# Altium PCB uc3843 flyback converter.PcbDoc
Units mm, origin at the board's own origin, x right, y up, seen from the top; angles counter-clockwise.
Board outline 81 x 40.73 mm, 2 copper layers (Top Layer, Bottom Layer); 30 components, 18 nets, 79 pads, 130 vias.
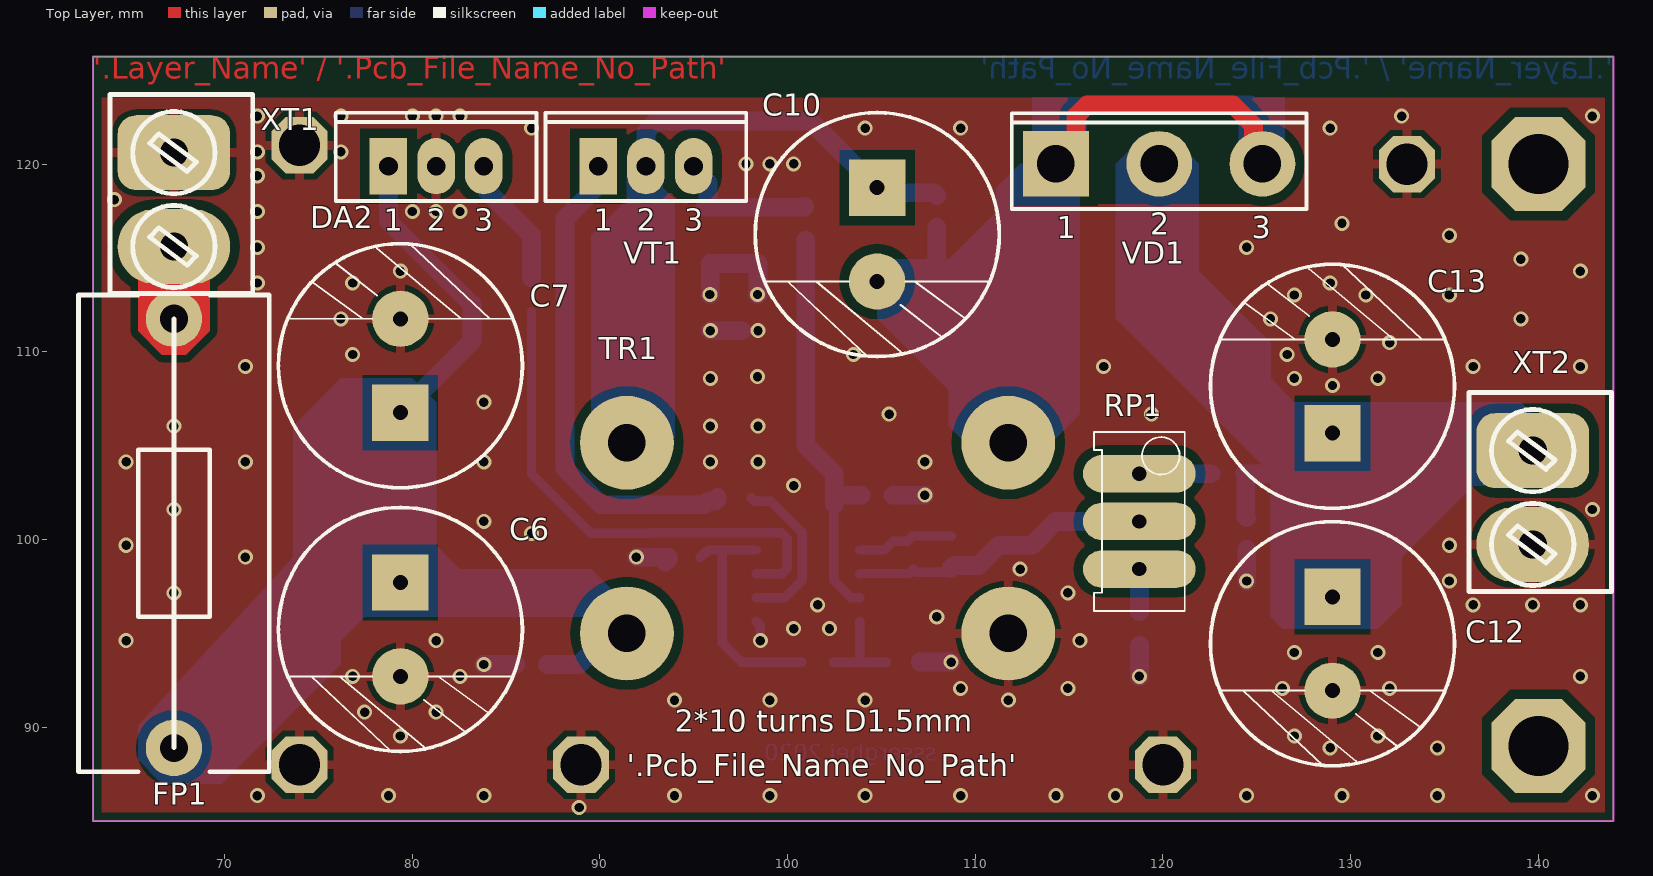
[diagram p0: Top Layer view]
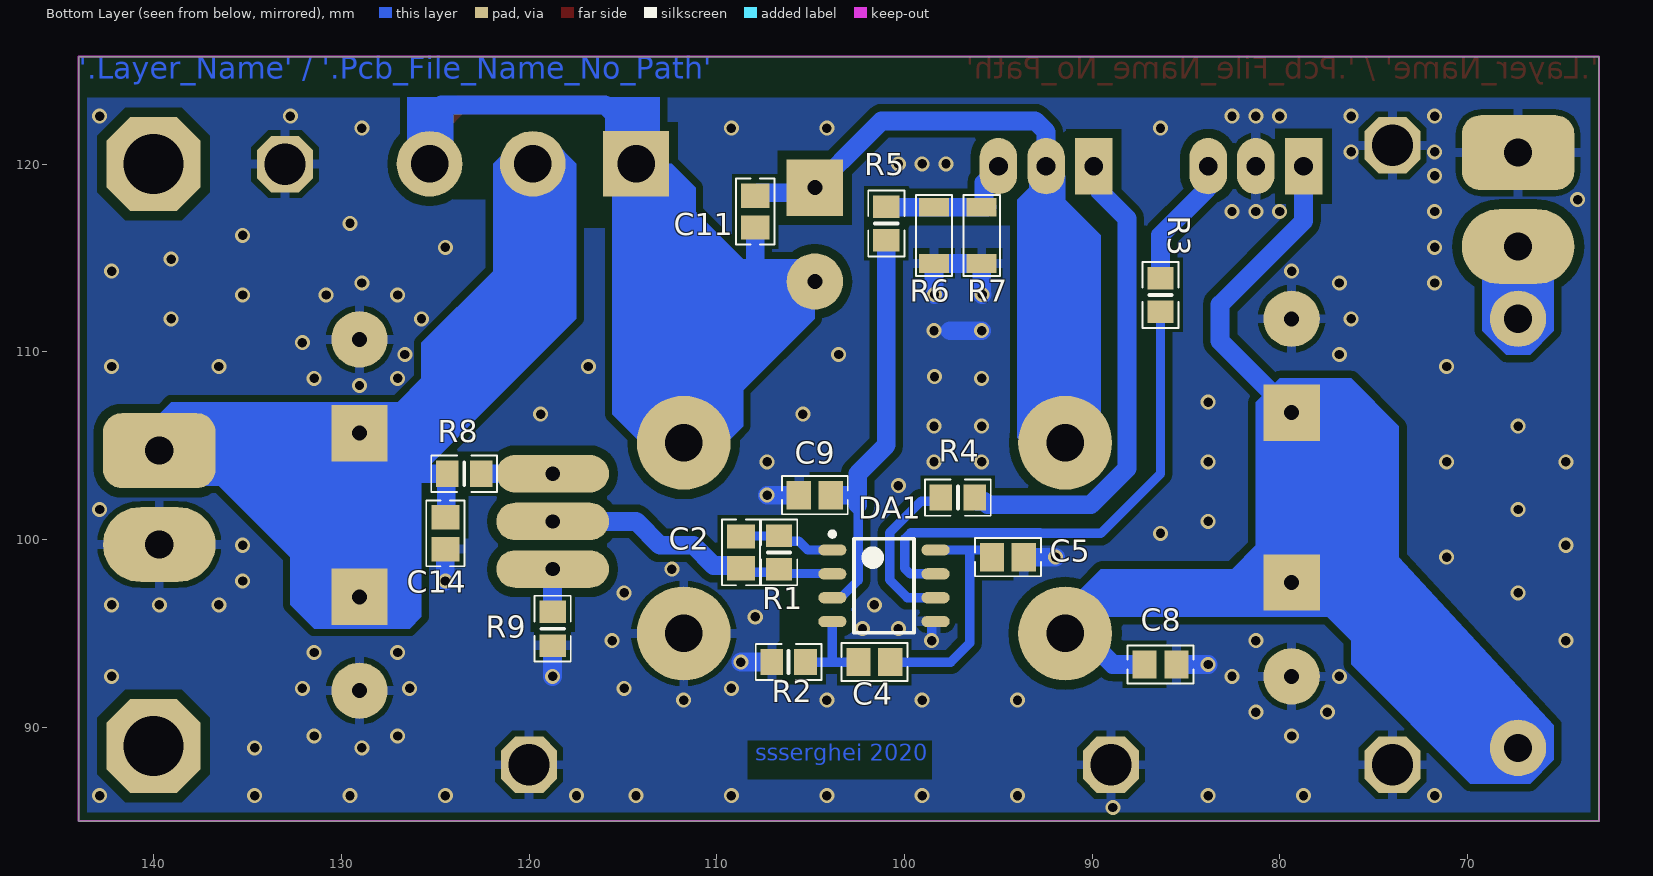
[diagram p1: Bottom Layer view, seen from below]
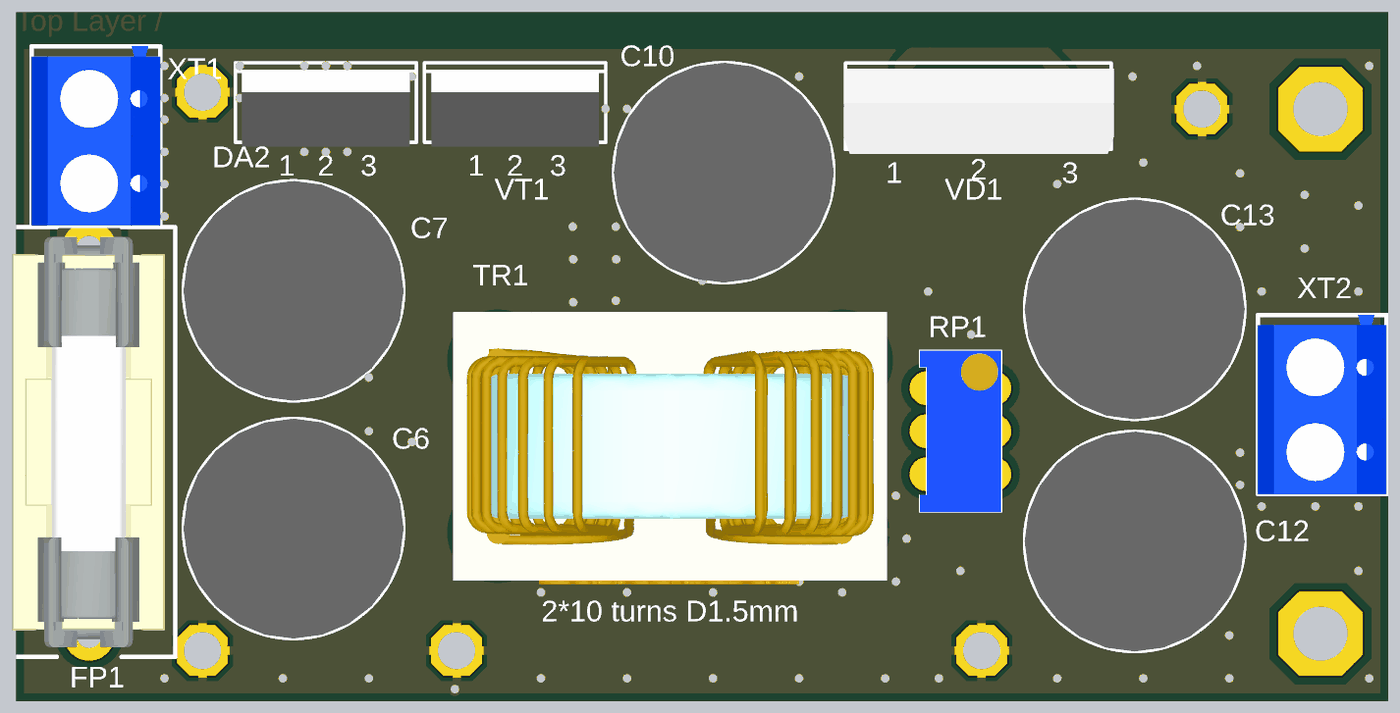
[diagram p2: 3D render of the assembled board from above, using the file's embedded part models]
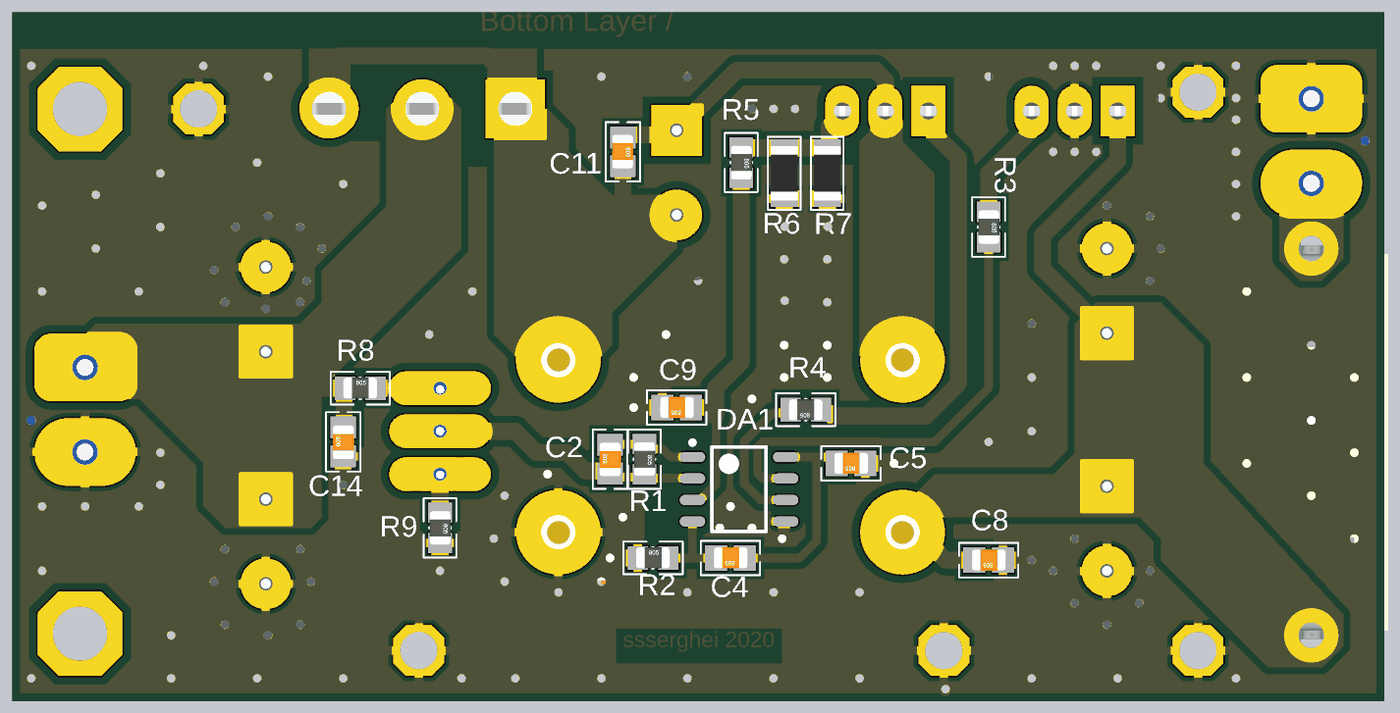
[diagram p3: 3D render of the assembled board from below, using the file's embedded part models]

## Layer stack, top to bottom
Top Solder: solder mask 0.0102, Solder Resist, Dk 3.5
Top Layer: signal copper 0.0356
Dielectric 1: dielectric 0.32, FR-4, Dk 4.8
Bottom Layer: signal copper 0.0356
Bottom Solder: solder mask 0.0102, Solder Resist, Dk 3.5

## Board outline
63,85 144,85 144,125.73 63,125.73

## Design rules (kind name [scope] priority, off if disabled: settings)
Clearance Clearance_1 [All vs InPolygon] p1: gap=0.4 ignorepadtopadclearanceinfootprint=TRUE except(0: Arc-Hole Track-Hole SMDPad-Hole THPad-Hole Via-Hole Fill-Hole Poly-Hole Region-Hole Text-Hole; 0.5: SMDPad-Fill SMDPad-Poly SMDPad-Region THPad-Fill THPad-Poly THPad-Region)
Clearance [All] p2: gap=0.3 ignorepadtopadclearanceinfootprint=TRUE except(0: Arc-Hole Track-Hole SMDPad-Hole THPad-Hole Via-Hole Fill-Hole Poly-Hole Region-Hole Text-Hole)
Height [All] p1: minheight=0 maxheight=100 prefheight=12.7
PlaneConnect [All] p1: planeconnectstyle=Relief reliefexpansion=0.508 reliefentries=4 reliefconductorwidth=0.5 reliefairgap=0.254
PolygonConnect [All] p1: thpad.connectstyle=Relief thpad.reliefconductorwidth=0.5 thpad.reliefentries=4 thpad.polygonreliefangle="90 Angle" thpad.airgapwidth=0.3 smdpad.connectstyle=Relief smdpad.reliefconductorwidth=0.5 smdpad.reliefentries=4 smdpad.polygonreliefangle="90 Angle" smdpad.airgapwidth=0.3 via.connectstyle=Direct via.reliefconductorwidth=0.5 via.reliefentries=4 via.polygonreliefangle="90 Angle" via.airgapwidth=0.254
RoutingVias [All] p1: holewidth=0.5 width=0.8 viastyle="Through Hole" minholewidth=0.3 minwidth=0.6 maxholewidth=0.7 maxwidth=1.2
SolderMaskExpansion [All] p1: expansion=0.102 istentingtop=FALSE
Width [All] p1: maxlimit=1 minlimit=0.25 preferedwidth=0.5
28 further rules are at their usual default settings.

## Classes and differential pairs
component class "uc3843 flyback converter": C4 C7 C9 C11 C12 C13 DA1 DA2 FP1 R1 R2 R3 R4 R5 R6 R7 R8 R9 RP1 TR1 VD1 VT1 XT1 XT2

## Components (designator, comment, footprint, x,y, rotation, side; value= is the part's Value field where it differs from the comment)
C2 "220p" CAPC2012(0805)N 108.712,99.314 r90 bottom
C4 "2.2n" CAPC2012(0805)N 101.6,93.472 r0 bottom
C5 "100n" CAPC2012(0805)N 94.488,99.06 r0 bottom
C6 "1000uF 50V" CAPPRD500W60D1300H2650 79.375,97.71 r270 top
C7 "1000uF 50V" CAPPRD500W60D1300H2650 79.375,106.76 r90 top
C8 "100n" CAPC2012(0805)N 86.36,93.345 r0 bottom
C9 "330p" CAPC2012(0805)N 104.775,102.362 r0 bottom
C10 "1000uF 50V" CAPPRD500W60D1300H2650 104.775,118.745 r270 top
C11 "100n" CAPC2012(0805)N 107.95,117.475 r270 bottom
C12 "1000uF 50V" CAPPRD500W60D1300H2650 129.032,96.948 r270 top
C13 "1000uF 50V" CAPPRD500W60D1300H2650 129.032,105.664 r90 top
C14 "100n" CAPC2012(0805)N 124.46,100.33 r90 bottom
DA1 "UC3843BD1G" SO-8_N 101.092,97.536 r180 bottom
DA2 "L7812CV 12V 1.5A" TO-220AB 81.28,119.888 r0 top
FP1 "Fuse 5x20mm 10A" FUSE_5X20MM 67.31,111.76 r270 top
R1 "100k" RESC2012(0805)N 106.68,99.314 r270 bottom
R2 "8.2k" RESC2012(0805)N 106.172,93.472 r180 bottom
R3 "4,7" RESC2012(0805)N 86.36,113.03 r270 bottom
R4 "4,7" RESC2012(0805)N 97.155,102.235 r0 bottom
R5 "1k" RESC2012(0805)N 100.965,116.84 r270 bottom
R6 "0.1" 1206 98.425,116.205 r90 bottom
R7 "0.1" 1206 95.885,116.205 r90 bottom
R8 "1k" RESC2012(0805)N 123.455,103.505 r180 bottom
R9 "1k" RESC2012(0805)N 118.745,95.25 r270 bottom
RP1 "Pot. 3296W" 3296W 118.745,100.965 r180 top
TR1 "Trans Cupl" Coilcraft-CMT1_3 101.6,100.076 r0 top
VD1 "MBR10100" TO-247AD 119.8,120.015 r0 top
VT1 "IRFZ44" TO-220AB 92.456,119.888 r0 top
XT1 "DG301-5.0-2P12" DG301-5.0-2P12 67.31,118.11 r270 top
XT2 "DG301-5.0-2P12" DG301-5.0-2P12 139.7,102.235 r270 top

## Footprints (in the part's own frame and the unit in brackets; to place one, negate y for a bottom-side part, rotate by r counter-clockwise, add the part's x,y. Pads: shape width x height; smd on the part's side, far side on the other; paste and mask are expansions set on the pad)
1206 [mm]
  rect 1x1.6 smd: 1(-1.499,0) 2(1.501,0)
  silkscreen extent -2.16,-0.97 2.16,0.97, body extent -1.6,-0.8 1.6,0.8, height 0.6
3296W [mm] "BOURNS 10-turn trimmer, 3296W type (THT)"
  oval 6x2 hole 0.762: 1(0,-2.54) 2(0,0) 3(0,2.54)
  silkscreen extent -2.42,-4.77 2.41,4.76, body extent -2.4,-4.77 2.4,4.76, height 11.55
CAPC2012(0805)N [mm] "Chip Capacitor, Body 2.0x1.3mm, IPC Medium Density"
  rect 1.3x1.5 smd: 1(-0.85,0) 2(0.85,0)
  silkscreen extent -1.75,-1.02 1.75,1.02, body extent -1.02,-0.64 0.98,0.61, height 0.78
CAPPRD500W60D1300H2650 [mm]
  rect 3x3 hole 0.8: 1(0,0)
  round 3 hole 0.8: 2(5,0)
  silkscreen extent -4,-6.5 9,6.5, body extent -4,-6.5 9,6.5, height 26.5
Coilcraft-CMT1_3 [mm] "Coilcraft’s CMT toroid style common mode chokes"
  round 5 hole 2: 1(-10.16,5.08) 2(-10.16,-5.08) 3(10.16,5.08) 4(10.16,-5.08)
  body extent -12.8,-8.15 12.8,7.95, height 28.27
DG301-5.0-2P12 [mm] "Terminal Block 2 x 5 mm Pitch"
  rrect50% 4x6 hole 1.5: 1(-2.5,0)
  oval 4x6 hole 1.5: 2(2.5,0)
  silkscreen extent -5.6,-3.4 5,4.2, body extent -5.6,-3.4 5,4.2, height 10
FUSE_5X20MM [mm]
  round 3 hole 1.5: 1(0,0) 2(22.86,0)
  silkscreen extent -1.27,-5.08 24.13,5.08, body extent -0.68,-4.54 23.57,4.46, height 14.47
RESC2012(0805)N [mm] "Chip Resistor, Body 2.0x1.3mm, IPC Medium Density"
  rect 1.2x1.4 smd: 1(-0.9,0) 2(0.9,0)
  silkscreen extent -1.75,-0.97 1.75,0.97, body extent -1,-0.62 1,0.63, height 0.78
SO-8_N [mm] "8-Pin Small Outline Integrated Circuit 1.27 mm Pitch, IPC Medium Density"
  oval 1.5x0.6 smd: 1(-2.75,1.905) 2(-2.75,0.635) 3(-2.75,-0.635) 4(-2.75,-1.905) 5(2.75,-1.905) 6(2.75,-0.635) 7(2.75,0.635) 8(2.75,1.905)
  silkscreen extent -2.88,-2.5 1.6,2.88, body extent -2,-2.5 2,2.5, height 1.73
TO-220AB [mm] "TO, Thru-Hole, Vertical, Heatsink Mounted; 3 In-Line Leads; Pitch 2.54 mm"
  rect 2x3 hole 1: 1(-2.54,0)
  oval 2x3 hole 1: 2(0,0) 3(2.54,0)
  silkscreen extent -5.35,-1.85 5.35,2.85, body extent -4.95,-2.1 4.95,2.4, height 27.8
TO-247AD [mm] "SIP with Mounting Hole; 3 Leads; Pitch 5.5 mm"
  rect 3.5x3.5 hole 2: 1(-5.5,0)
  round 3.5 hole 2: 2(0,0) 3(5.5,0)
  silkscreen extent -7.85,-2.4 7.85,2.7, body extent -7.95,-2.67 8,2.36, height 31

## Part data
C2 C4 C5 C8 C9 C11 C14: library part CAPC2012(0805), Package=0805, Part Number=CAPC2012(0805)
C6 C7 C10 C12 C13: library part UVY1H102MHD, "CAP ALUM 1000UF 20% 50V RADIAL", Digi-Key Part Number=UVY1H102MHD-ND, Package="TH 2 pin", HelpURL=https://www.digikey.com/product-detail/en/nichicon/UVY1H102MHD/UVY1H102MHD-ND/2428007, Manufacturer Part Number=UVY1H102MHD, Part Number=UVY1H102MHD, Price$=0.31818
DA1: "Switching Controllers 52kHz 1A Current PWM w/96% Duty Cycle Max", Manufacturer_Name="ON Semiconductor", Mouser Part Number=863-UC3843BD1G, Arrow Part Number=UC3843BD1G, Arrow Price/Stock=https://www.arrow.com/en/products/uc3843bd1g/on-semiconductor, Datasheet Link=http://www.onsemi.com/pub/Collateral/UC3842B-D.PDF, Height=1.75mm, HelpURL=https://eu.mouser.com/ProductDetail/ON-Semiconductor/UC3843BD1G?qs=xZq1yRCsb1e%2FKCJUacBVZA%3D%3D, Manufacturer Part Number=UC3843BD1G, Manufacturer_Part_Number=UC3843BD1G, Mouser Price/Stock=https://www.mouser.co.uk/ProductDetail/ON-Semiconductor/UC3843BD1G?qs=xZq1yRCsb1e%2FKCJUacBVZA%3D%3D, Part Number=UC3843BD1G, Price$=0.207
DA2: library part L7812CV, "Linear Voltage Regulator IC  1 Output  1.5A TO-220AB", Digi-Key Part Number=497-1452-5-ND, HelpURL=https://www.digikey.com/product-detail/en/stmicroelectronics/L7812CV/497-1452-5-ND/585973, Manufacturer Part Number=L7812CV, Part Number=L7812CV
FP1: library part "Fuse 5x20mm", Part Number="Fuse 5x20mm"
R1 R2 R3 R4 R5 R8 R9: library part RESC2012(0805), Package=0805, Part Number=RESC2012(0805)
R6 R7: library part RESC3216(1206), Package=1206, Part Number=RESC3216(1206)
RP1: Manufacturer Part Number=???, HelpURL=https://www.bourns.com/pdfs/3296.pdf, Part Number="Pot. 3296W"
TR1: library part Coilcraft-CMT1_3, "Coilcraft’s CMT toroid style common mode chokes", HelpURL=http://www.3dcontentcentral.com/download-model.aspx?catalogid=171&id=656307, LatestRevisionDate=17-Jul-2002, LatestRevisionNote="Re-released for DXP Platform.", PackageDescription="Transformer; 4 Leads", PackageReference=TRF_4, Part Number=Coilcraft-CMT1_3, Published=8-Jun-2000, Publisher="Altium Limited"
VD1: library part MBR40H60PT-E3/45, "Schottky Diodes & Rectifiers 60 Volt 40A Dual Common-Cathode", HelpURL=http://ru.mouser.com/ProductDetail/Vishay-Semiconductors/MBR40H60PT-E3-45/?qs=NyKJzQ80QAwtL1bZZnr79w%3D%3D, Part Number=MBR40H60PT-E3/45
VT1: library part IRF630, HelpURL=http://www.vishay.com/docs/91031/sihf630p.pdf, Part Number=IRF630
XT1 XT2: Part Number=DG301-5.0-2P12

## Free pads (board coordinates)
  oct 3x3 hole 2.2 mask+0.102: 0(74,88) 0(74,121) 0(89,88) 0(120,88) 0(133,120)
  oct 5x5 hole 3.2 mask+0.102: 0(140,89) 0(140,120)

## Via types
v1: diameter 0.8, hole 0.5, Top Layer to Bottom Layer, tented both sides, 130 vias

## Nets (pads, with @x,y where several pads share a name; then routed paths per layer and width w, separated by ;. In a path a pad name is that pad's centre, name@x,y a point inside that pad or via, vN(x,y) a via of type N, cw(c..) or ccw(c..) an arc to the next point about the centre after c; other vN are vias at no path point)
GND: C5.1 C6.2 C7.2 C8.1 C9.2 C12.2 C13.2 C14.1 DA1.5 DA2.2 pad.0@74,88 pad.0@74,121 pad.0@89,88 pad.0@120,88 pad.0@133,120 R2.1 R6.1 R7.1 R9.2 TR1.4 XT1.1 XT2.2 | length 19
  Bottom Layer w0.5: DA1.5 98.552,95.421 v1(98.552,94.615)
  Bottom Layer w1: v1(83.82,93.345) C8.1 ; v1(91.948,99.06) C5.1 93.638,98.96 C5.1@93.488,98.81 ; v1(95.86,113.052) 95.885,113.077 R7.1 R6.1 98.425,113.076 v1(98.401,113.052) ; v1(95.885,111.125) 97.575,111.125 ; C9.2 v1(107.315,102.362) ; R2.1 v1(108.712,93.472) ; v1(118.745,92.71) R9.2 ; v1(124.46,97.79) C14.1
  other v1: 88.9,85.725 71.755,86.36 78.74,86.36 83.82,86.36 93.98,86.36 99.06,86.36 104.14,86.36 109.22,86.36 114.3,86.36 117.475,86.36 124.46,86.36 129.54,86.36 134.62,86.36 142.875,86.36 128.905,88.9 134.62,88.9 79.375,89.535 127,89.535 131.445,89.535 77.47,90.805 81.28,90.805 93.98,91.44 99.06,91.44 104.14,91.44 111.76,91.44 109.22,92.075 114.935,92.075 126.365,92.075 132.08,92.075 76.835,92.71 82.55,92.71 142.24,92.71 127,93.98 131.445,93.98 64.77,94.615 81.28,94.615 115.57,94.615 100.33,95.25 102.235,95.25 107.95,95.885 101.6,96.52 136.525,96.52 139.7,96.52 142.24,96.52 67.31,97.155 114.935,97.155 135.255,97.79 112.395,98.425 71.12,99.06 64.77,99.695 135.255,99.695 86.36,100.33 83.82,100.965 67.31,101.6 142.875,101.6 100.33,102.87 64.77,104.14 71.12,104.14 83.82,104.14 95.885,104.14 98.425,104.14 107.315,104.14 67.31,106.045 95.885,106.045 98.425,106.045 105.41,106.68 119.38,106.68 83.82,107.315 129.032,108.204 95.885,108.585 127,108.585 131.445,108.585 98.402,108.679 71.12,109.22 116.84,109.22 136.525,109.22 142.24,109.22 76.835,109.855 103.505,109.855 126.619,109.855 132.08,110.49 98.425,111.125 76.2,111.76 125.73,111.76 139.065,111.76 127,113.03 130.81,113.03 135.255,113.03 71.755,113.665 76.835,113.665 128.905,113.665 79.375,114.3 142.24,114.3 139.065,114.935 71.755,115.57 124.46,115.57 135.255,116.205 129.54,116.84 71.755,117.475 80.01,117.475 81.28,117.475 82.55,117.475 64.135,118.11 71.755,119.38 97.79,120.015 99.06,120.015 100.33,120.015 71.755,120.65 76.2,120.65 86.36,121.92 104.14,121.92 109.22,121.92 128.905,121.92 71.755,122.555 76.2,122.555 80.01,122.555 81.28,122.555 82.55,122.555 132.715,122.555 142.875,122.555
NetC2_1: C2.1 DA1.2 R1.2 RP1.2 | length 16.2
  Bottom Layer w0.5: DA1.2 103.861,98.19 106.456,98.19 R1.2@106.705,98.439 ; R1.2 106.847,98.247 108.495,98.247 C2.1
  Bottom Layer w1: C2.1 108.862,98.614 110.158,98.614 111.239,99.695 113.03,99.695 114.3,100.965 RP1.2
NetC2_2: C2.2 DA1.1 R1.1 | length 5.2
  Bottom Layer w0.5: DA1.1 105.156,99.441 105.624,99.909 106.375,99.909 R1.1 106.705,100.189 108.687,100.189 C2.2
NetC4_1: C4.1 C5.2 DA1.8 | length 12.8
  Bottom Layer w0.5: C5.2 95.572,99.294 95.666,99.294 95.813,99.441 96.52,99.441 ; DA1.8 96.52,99.441 ; C4.1 97.536,93.472 96.52,94.488 96.52,99.441
NetC4_2: C4.2 DA1.4 R2.2 | length 5
  Bottom Layer w0.5: C4.2 103.842,93.472 ; DA1.4 103.842,93.472 ; R2.2 103.922,93.472 103.842,93.472
NetC6_1: C6.1 C7.1 C8.2 DA2.1 FP1.2 TR1.2 | length 61.6
  Bottom Layer w0.5: TR1.2@89.916,96.52 TR1.2
  Bottom Layer w1: FP1.2 67.851,88.9 69.287,90.336 70.016,90.336 76.465,96.785 78.45,96.785 C6.1 ; DA2.1 78.74,116.967 83.185,112.522 83.185,110.57 C7.1 C6.1 ; C8.2 88.9,93.345 90.551,94.996 TR1.2 89.916,96.52 80.961,96.52 80.771,96.71 80.375,96.71 C6.1
NetC9_1: C9.1 DA1.3 R5.2 | length 21.9
  Bottom Layer w0.5: 102.457,101.854 102.457,97.836 103.392,96.901 DA1.3
  Bottom Layer w1: R5.2 100.965,105.029 102.489,103.505 102.489,102.362 ; 102.489,101.854 102.489,102.362 ; C9.1 102.489,102.362
NetC10_1: C10.1 C11.1 TR1.1 VT1.2 | length 35
  Bottom Layer w1: TR1.1 92.205,105.921 92.205,107.491 92.456,107.742 VT1.2 92.456,121.715 93.042,122.301 101.219,122.301 105.593,117.927 105.593,118.293 105.775,118.475 107.8,118.475 C11.1
NetC10_2: C10.2 C11.2 TR1.3 VD1.1 VD1.3 | length 63.1
  Top Layer w1: VD1.1 115.372,121.087 115.372,122.564 115.958,123.15 123.738,123.15 124.822,122.066 124.822,120.493 VD1.3
  Bottom Layer w1: C10.2 104.855,113.665 107.95,113.665 ; C11.2 107.95,113.665 ; TR1.3 111.76,106.238 113.03,107.508 ; VD1.1 113.05,118.765 113.05,117.176 113.03,117.156 113.03,107.508 ; VD1.1@115.372,121.087 115.372,122.564 115.958,123.15 124.667,123.15 125.253,122.564 125.253,120.062 VD1.3 ; 107.95,113.665 113.03,113.665 113.03,107.508
NetC12_1: C12.1 C13.1 C14.2 R8.1 VD1.2 XT2.1 | length 29.7
  Bottom Layer w1: C14.2 124.407,101.233 124.407,103.453 R8.1 126.918,103.505 127.625,102.798 128.785,102.798 129.032,102.551 ; C13.1@128.905,104.88 129.032,104.753 129.032,102.551 ; C13.1@129.021,105.675 C13.1@129.17,105.675 ; C12.1 129.032,102.551 ; C13.1 129.032,104.88 129.032,102.551 ; C13.1@129.222,105.727 C13.1@129.54,105.41 ; C13.1@129.54,105.664 138.771,105.664 XT2.1
NetDA1_6: DA1.6 R4.2 | length 8.9
  Bottom Layer w0.5: R4.2 98.246,102.044 99.112,102.044 100.788,100.368 100.788,97.849 99.842,96.903 98.344,96.903 DA1.6
NetDA1_7: DA1.7 R3.2 | length 27.1
  Bottom Layer w0.5: R3.2 86.36,103.505 89.535,100.33 92.73,100.33 92.76,100.36 99.665,100.36 99.988,100.037 99.988,98.464 99.695,98.171 DA1.7
NetDA2_3: DA2.3 R3.1 | length 7
  Bottom Layer w1: DA2.3 83.875,119.833 83.875,118.69 86.36,116.205 R3.1
NetFP1_1: FP1.1 XT1.2 | length 3.8
  Bottom Layer w1: FP1.1 XT1.2
NetR4_1: R4.1 VT1.1 | length 26
  Bottom Layer w1: VT1.1 89.616,119.588 89.616,118.572 88.14,117.096 88.14,103.789 90.073,101.856 95.569,101.856 95.748,102.035 96.155,102.035 96.255,102.135 R4.1
NetR5_1: R5.1 R6.2 R7.2 VT1.3 | length 8.1
  Bottom Layer w0.5: R5.1@100.865,117.74 R5.1
  Bottom Layer w1: VT1.3 94.996,119.766 95.759,119.002 95.759,117.706 R7.2 ; R7.2@95.585,117.706 R6.2 100.881,117.706 R5.1@100.915,117.74
NetR8_2: R8.2 RP1.1 | length 3.8
  Bottom Layer w1: RP1.1 R8.2
NetR9_1: R9.1 RP1.3 | length 2.3
  Bottom Layer w1: R9.1 RP1.3

## Polygon pours and split planes (outlines as drawn)
no net on Bottom Layer "NONET_L02_P002" (solid, remove dead copper, pour order 2): 116,121
GND on Bottom Layer "GND_L02_P000" (solid, remove dead copper, pour order 0): 63,124 144,124 144,85 63,85
GND on Top Layer "GND_L01_P001" (solid, remove dead copper, pour order 1): 63,124 144,124 144,78 63,78

## Keep-outs
Keep-Out Layer:
  the board outline again, w0.1

## Other copper
Top Layer:
  pour cut-out: 116.554,118.364 124.841,118.364 124.841,117.856 116.554,117.856
  region net NetFP1_1: 66.675,116.205 67.945,116.205 69.215,114.935 69.215,111.125 67.945,109.855 66.675,109.855 65.405,111.125 65.405,114.935
  text "'.Layer_Name' / '.Pcb_File_Name_No_Path'" at 63,124.16 h2
Bottom Layer:
  rectangle net NetC10_2: 124.03,121.031 126.492,123.571
  rectangle net NetC10_2: 113.03,121.285 115.951,123.571
  pour cut-out: 104.781,97.535 106.68,97.535 106.68,94.488 104.781,94.488
  pour cut-out: 93.789,117.221 95.186,117.221 95.186,116.713 93.789,116.713
  pour cut-out: 122.237,118.618 124.044,118.618 124.044,118.11 122.237,118.11
  pour cut-out: 115.824,117.094 117.221,117.094 117.221,116.586 115.824,116.586
  region net NetFP1_1: 66.675,116.205 67.945,116.205 69.215,114.935 69.215,111.125 67.945,109.855 66.675,109.855 65.405,111.125 65.405,114.935
  region net NetC10_1: 89.535,106.68 91.44,104.775 93.345,104.775 93.98,105.41 93.98,118.11 93.345,118.745 93.345,119.38 92.71,120.015 92.075,120.015 91.44,119.38 91.44,118.11 89.535,116.205
  region net NetC10_2: 115.57,106.68 113.03,104.14 110.49,104.14 108.585,106.045 108.585,107.95 104.775,111.76 104.775,114.935 108.585,114.935 111.125,117.475 111.125,118.745 112.395,120.015 115.57,120.015
  region net NetC6_1: 65.405,90.117 65.405,88.265 66.675,86.995 69.85,86.995 76.2,93.345 76.2,94.615 77.47,95.885 90.805,95.885 90.805,97.155 89.535,98.425 82.55,98.425 81.28,99.695 81.28,107.315 80.01,108.585 76.2,108.585 73.66,106.045 73.66,99.06
  region net NetC12_1: 117.475,120.015 118.745,121.285 120.65,121.285 121.92,120.015 121.92,114.3 125.73,110.49 125.73,108.585 127,107.315 139.065,107.315 140.335,106.045 140.335,102.87 136.525,102.87 132.715,99.06 132.715,96.52 131.445,95.25 126.365,95.25 125.73,95.885 125.73,103.505 117.475,111.76
  text "'.Layer_Name' / '.Pcb_File_Name_No_Path'" at 144,124.16 h2
  text "ssserghei 2020" at 107.95,87.924 h1.5

## Silkscreen, mask and mechanical layers (free items; w line width, h text height)
Top Overlay:
  text "2*10 turns D1.5mm" at 93.998,89.359 h2
  text "'.Pcb_File_Name_No_Path'" at 91.44,86.995 h2
Dimensions:
  lines w0.3: 163,53 237,53 237,85 163,85 163,53 ; 163,89 241,89 241,121 163,121 163,89
  text "0295-00 ELEKTRO-PLAST NASIELSK" at 165,118.005 h2
  text "0295-00 ELEKTRO-PLAST NASIELSK" at 165,82.005 h2

## Dimensions
237,85 to 237,53 on Dimensions
237,85 to 163,85 on Dimensions
241,121 to 163,121 on Dimensions
241,121 to 241,89 on Dimensions
140,89 to 140,120 on Dimensions
144,125.73 to 144,85 on Dimensions
63,125.73 to 144,125.73 on Dimensions

## Text inside footprints (layer, text, board x,y; h text height)
DA2: Top Overlay "3" at 83.32,116.063 h2; Top Overlay "1" at 78.49,116.063 h2; Top Overlay "2" at 80.78,116.063 h2
VD1: Top Overlay "3" at 124.73,115.64 h2; Top Overlay "2" at 119.323,115.832 h2; Top Overlay "1" at 114.338,115.64 h2
VT1: Top Overlay "2" at 91.956,116.063 h2; Top Overlay "1" at 89.666,116.063 h2; Top Overlay "3" at 94.496,116.063 h2